# EAGLE board SparkFun_DC-DC_Converter_Breakout_Panel_v12 (EAGLE 7.4.0), part 1 of 2
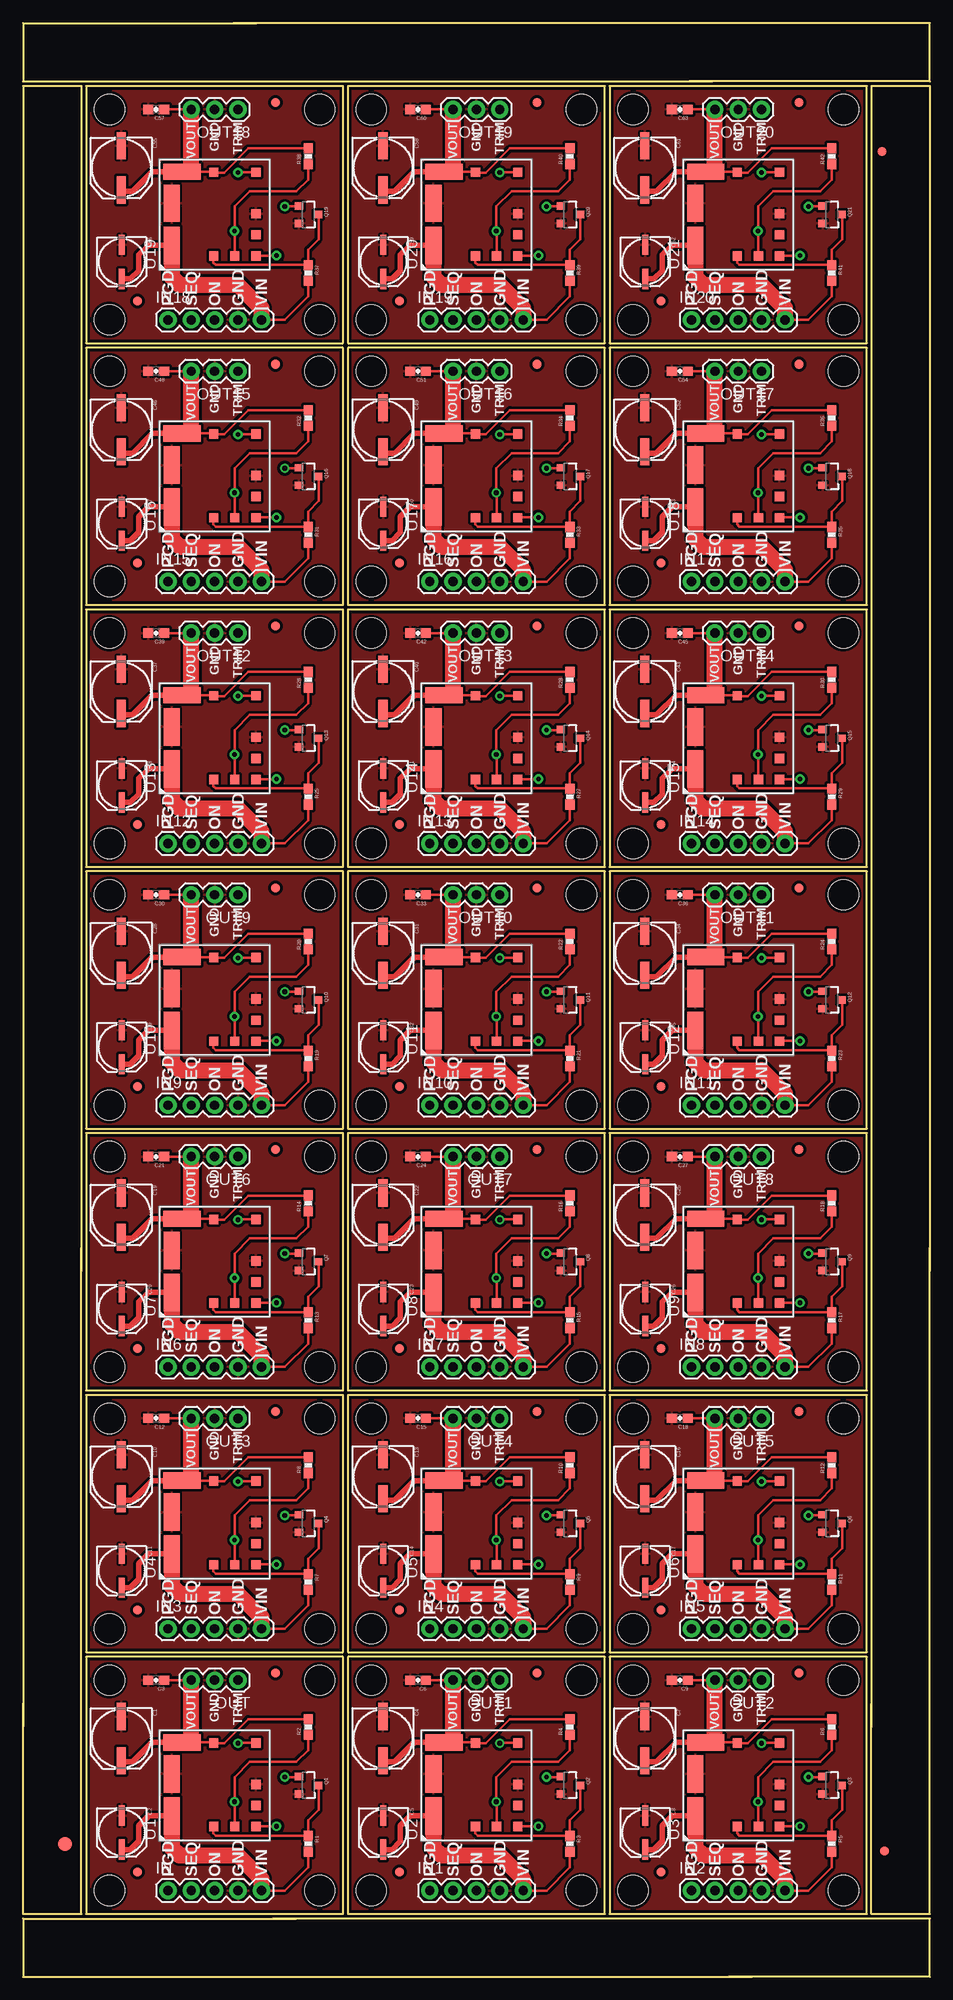
[diagram p0: board, top side]
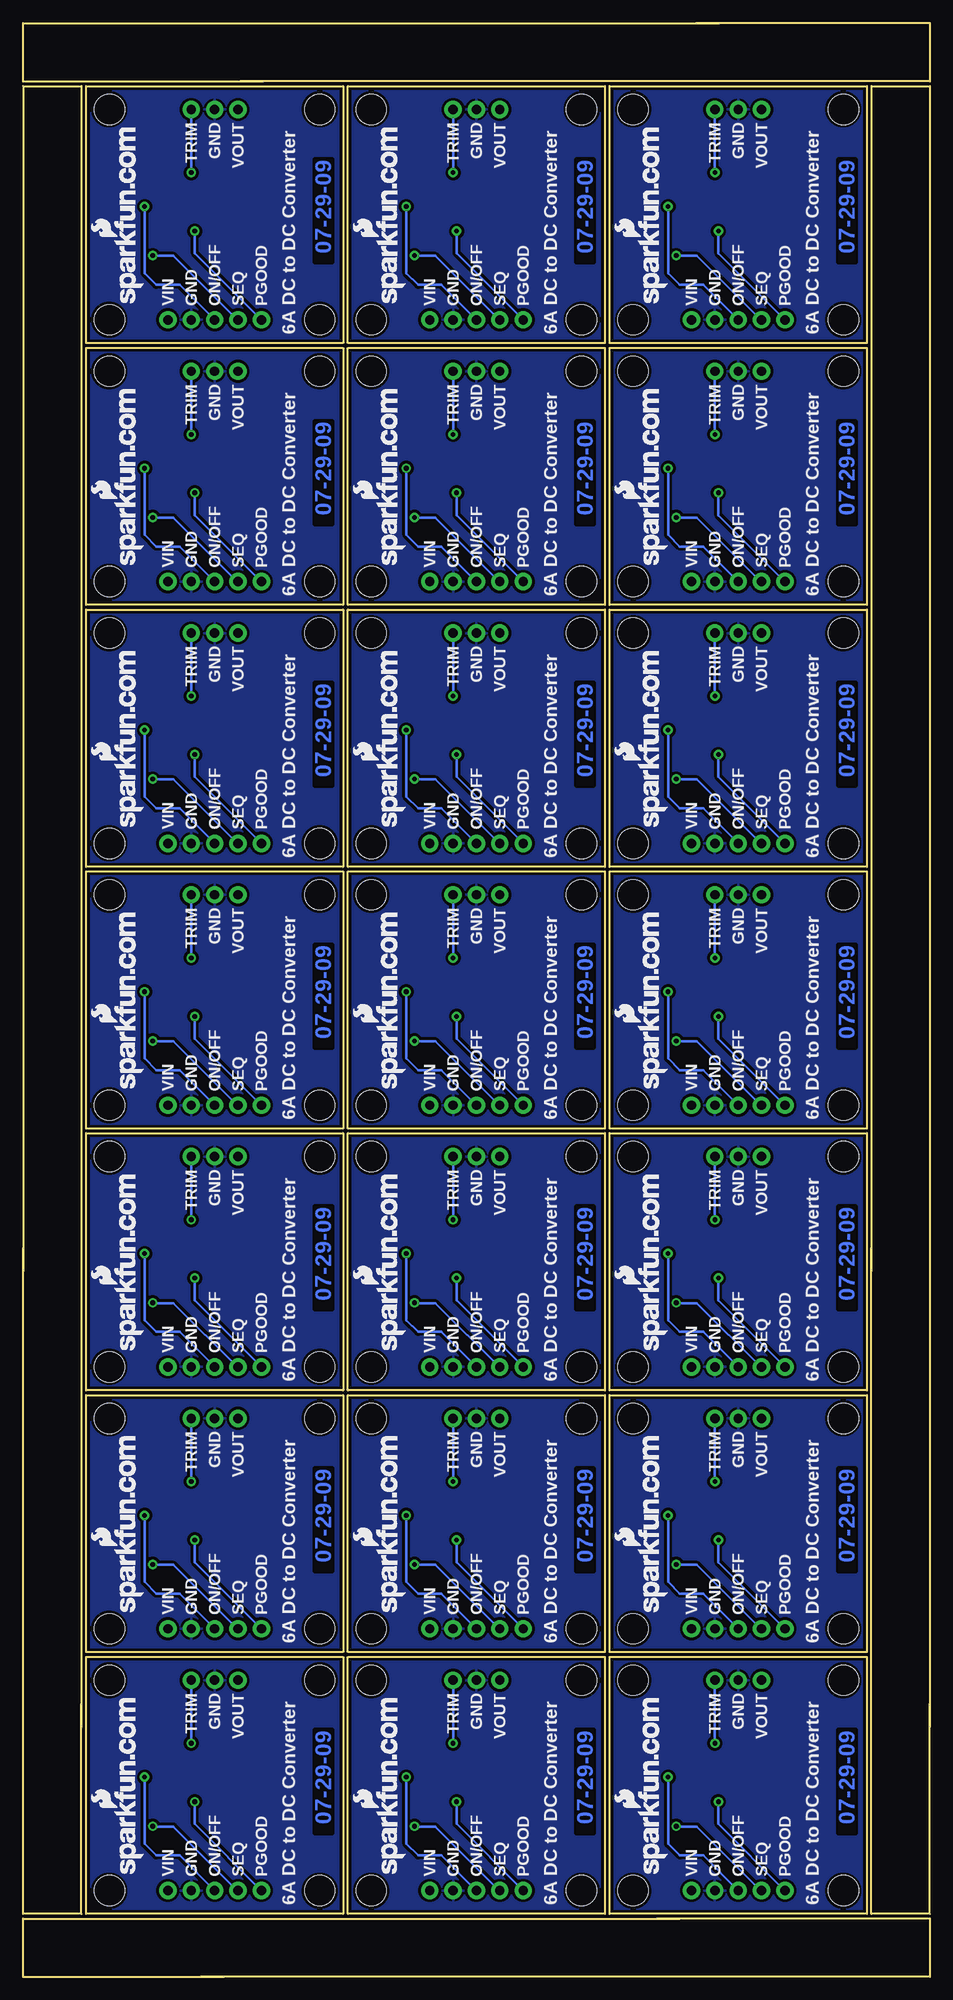
[diagram p1: board, bottom side, seen from below]

Size 98.55 x 212.34 mm. Coordinates in mm from the lower left corner, seen from the top.
Outline: 6.35,79.25 6.35,6.86 0,6.86 0,29.72
Outline: 0,27.18 0,205.49 6.35,205.49 6.35,76.71
Outline: 79.25,0 0,0 0,6.35 29.72,6.35
Outline: 27.18,6.35 98.55,6.35 98.55,0 76.71,0
Outline: 98.55,79.25 98.55,6.86 92.2,6.86 92.2,29.72
Outline: 92.2,27.18 92.2,205.49 98.55,205.49 98.55,76.71
Outline: 22.86,212.34 98.55,212.34 98.55,205.99 72.39,205.99
Outline: 74.93,205.99 0,205.99 0,212.34 25.4,212.34
Outline: 6.86,6.86 34.8,6.86 34.8,34.8 6.86,34.8 6.86,6.86
Outline: 35.31,6.86 63.25,6.86 63.25,34.8 35.31,34.8 35.31,6.86
Outline: 63.75,6.86 91.69,6.86 91.69,34.8 63.75,34.8 63.75,6.86
Outline: 6.86,35.31 34.8,35.31 34.8,63.25 6.86,63.25 6.86,35.31
Outline: 35.31,35.31 63.25,35.31 63.25,63.25 35.31,63.25 35.31,35.31
Outline: 63.75,35.31 91.69,35.31 91.69,63.25 63.75,63.25 63.75,35.31
Outline: 6.86,63.75 34.8,63.75 34.8,91.69 6.86,91.69 6.86,63.75
Outline: 35.31,63.75 63.25,63.75 63.25,91.69 35.31,91.69 35.31,63.75
Outline: 63.75,63.75 91.69,63.75 91.69,91.69 63.75,91.69 63.75,63.75
Outline: 6.86,92.2 34.8,92.2 34.8,120.14 6.86,120.14 6.86,92.2
Outline: 35.31,92.2 63.25,92.2 63.25,120.14 35.31,120.14 35.31,92.2
Outline: 63.75,92.2 91.69,92.2 91.69,120.14 63.75,120.14 63.75,92.2
Outline: 6.86,120.65 34.8,120.65 34.8,148.59 6.86,148.59 6.86,120.65
Outline: 35.31,120.65 63.25,120.65 63.25,148.59 35.31,148.59 35.31,120.65
Outline: 63.75,120.65 91.69,120.65 91.69,148.59 63.75,148.59 63.75,120.65
Outline: 6.86,149.1 34.8,149.1 34.8,177.04 6.86,177.04 6.86,149.1
Outline: 35.31,149.1 63.25,149.1 63.25,177.04 35.31,177.04 35.31,149.1
Outline: 63.75,149.1 91.69,149.1 91.69,177.04 63.75,177.04 63.75,149.1
Outline: 6.86,177.55 34.8,177.55 34.8,205.49 6.86,205.49 6.86,177.55
Outline: 35.31,177.55 63.25,177.55 63.25,205.49 35.31,205.49 35.31,177.55
Outline: 63.75,177.55 91.69,177.55 91.69,205.49 63.75,205.49 63.75,177.55
Copper layers (1*16): Top 0.035mm / dielectric 1.5mm / Bottom 0.035mm
Design rules "SparkFun": minimum track width 8mil, minimum drill 20mil, track to track 8mil, track to pad 8mil, pad to pad 8mil, via to via 8mil, smd to smd 8mil, copper to edge 10mil, drill to drill 8mil, minimum pad ring 12mil, minimum via ring 10mil, stop-mask expansion 4mil, vias tented up to drill 25mil, thermal gap 10mil

## Footprints (pad centres in the part's own frame; a part is rotated, then mirrored left to right if it is on the bottom)
NIPPON_F80 = smd 2.95 x 1: + 2.4,0; - -2.4,0
PANASONIC_C = smd 2.2 x 0.65: + 1.9,-0.2; - -1.8,-0.2
0603-CAP = smd 1.1 x 1: 1 -0.85,0; 2 0.85,0
FIDUCIAL-1X2 = smd 1 x 1: 1 0,0
FIDUCIAL-1.5X3 = smd 1.5 x 1.5: 1 0,0
1X05 = drill 1.016 pad 1.88: 1 0,0; 2 2.54,0; 3 5.08,0; 4 7.62,0; 5 10.16,0
1X03 = drill 1.016 pad 1.88: 1 0,0; 2 2.54,0; 3 5.08,0
SOT23-3 = smd 0.8 x 0.9: 1 -0.95,-1; 2 0.95,-1; 3 0,1.1
0603-RES = smd 1.1 x 1: 1 -0.85,0; 2 0.85,0
DC-DC_CONVERTER = smd 1.01 x 1.01: 1 -4.48,0.1; 5 4.61,0.1; 6 4.61,-4.48; 7 0.1,-4.48; 8 -2.19,-4.48; 9 -4.48,-4.48; 10 -4.48,-2.19 | smd 4.07 x 1.77: 2 -3.33,4.67; 3 1.24,4.67 | smd 1.77 x 4.07: 4 4.67,3.53
STAND-OFF = hole 3.302: 0,0

## Placement (x,y rotation side)
C1  100uF-25V  [NIPPON_F80]  10.67,25.91 270 top
C2  22uF-35v  [PANASONIC_C]  10.92,15.75 270 top
C3  0.1uF  [0603-CAP]  14.48,32.26 180 top
C4  100uF-25V  [NIPPON_F80]  39.12,25.91 270 top
C5  22uF-35v  [PANASONIC_C]  39.37,15.75 270 top
C6  0.1uF  [0603-CAP]  42.93,32.26 180 top
C7  100uF-25V  [NIPPON_F80]  67.56,25.91 270 top
C8  22uF-35v  [PANASONIC_C]  67.82,15.75 270 top
C9  0.1uF  [0603-CAP]  71.37,32.26 180 top
C10  100uF-25V  [NIPPON_F80]  10.67,54.36 270 top
C11  22uF-35v  [PANASONIC_C]  10.92,44.2 270 top
C12  0.1uF  [0603-CAP]  14.48,60.71 180 top
C13  100uF-25V  [NIPPON_F80]  39.12,54.36 270 top
C14  22uF-35v  [PANASONIC_C]  39.37,44.2 270 top
C15  0.1uF  [0603-CAP]  42.93,60.71 180 top
C16  100uF-25V  [NIPPON_F80]  67.56,54.36 270 top
C17  22uF-35v  [PANASONIC_C]  67.82,44.2 270 top
C18  0.1uF  [0603-CAP]  71.37,60.71 180 top
C19  100uF-25V  [NIPPON_F80]  10.67,82.8 270 top
C20  22uF-35v  [PANASONIC_C]  10.92,72.64 270 top
C21  0.1uF  [0603-CAP]  14.48,89.15 180 top
C22  100uF-25V  [NIPPON_F80]  39.12,82.8 270 top
C23  22uF-35v  [PANASONIC_C]  39.37,72.64 270 top
C24  0.1uF  [0603-CAP]  42.93,89.15 180 top
C25  100uF-25V  [NIPPON_F80]  67.56,82.8 270 top
C26  22uF-35v  [PANASONIC_C]  67.82,72.64 270 top
C27  0.1uF  [0603-CAP]  71.37,89.15 180 top
C28  100uF-25V  [NIPPON_F80]  10.67,111.25 270 top
C29  22uF-35v  [PANASONIC_C]  10.92,101.09 270 top
C30  0.1uF  [0603-CAP]  14.48,117.6 180 top
C31  100uF-25V  [NIPPON_F80]  39.12,111.25 270 top
C32  22uF-35v  [PANASONIC_C]  39.37,101.09 270 top
C33  0.1uF  [0603-CAP]  42.93,117.6 180 top
C34  100uF-25V  [NIPPON_F80]  67.56,111.25 270 top
C35  22uF-35v  [PANASONIC_C]  67.82,101.09 270 top
C36  0.1uF  [0603-CAP]  71.37,117.6 180 top
C37  100uF-25V  [NIPPON_F80]  10.67,139.7 270 top
C38  22uF-35v  [PANASONIC_C]  10.92,129.54 270 top
C39  0.1uF  [0603-CAP]  14.48,146.05 180 top
C40  100uF-25V  [NIPPON_F80]  39.12,139.7 270 top
C41  22uF-35v  [PANASONIC_C]  39.37,129.54 270 top
C42  0.1uF  [0603-CAP]  42.93,146.05 180 top
C43  100uF-25V  [NIPPON_F80]  67.56,139.7 270 top
C44  22uF-35v  [PANASONIC_C]  67.82,129.54 270 top
C45  0.1uF  [0603-CAP]  71.37,146.05 180 top
C46  100uF-25V  [NIPPON_F80]  10.67,168.15 270 top
C47  22uF-35v  [PANASONIC_C]  10.92,157.99 270 top
C48  0.1uF  [0603-CAP]  14.48,174.5 180 top
C49  100uF-25V  [NIPPON_F80]  39.12,168.15 270 top
C50  22uF-35v  [PANASONIC_C]  39.37,157.99 270 top
C51  0.1uF  [0603-CAP]  42.93,174.5 180 top
C52  100uF-25V  [NIPPON_F80]  67.56,168.15 270 top
C53  22uF-35v  [PANASONIC_C]  67.82,157.99 270 top
C54  0.1uF  [0603-CAP]  71.37,174.5 180 top
C55  100uF-25V  [NIPPON_F80]  10.67,196.6 270 top
C56  22uF-35v  [PANASONIC_C]  10.92,186.44 270 top
C57  0.1uF  [0603-CAP]  14.48,202.95 180 top
C58  100uF-25V  [NIPPON_F80]  39.12,196.6 270 top
C59  22uF-35v  [PANASONIC_C]  39.37,186.44 270 top
C60  0.1uF  [0603-CAP]  42.93,202.95 180 top
C61  100uF-25V  [NIPPON_F80]  67.56,196.6 270 top
C62  22uF-35v  [PANASONIC_C]  67.82,186.44 270 top
C63  0.1uF  [0603-CAP]  71.37,202.95 180 top
E$1  [FIDUCIAL-1X2]  93.34,198.37 0 top
E$2  [FIDUCIAL-1.5X3]  4.57,14.48 0 top
E$5  [FIDUCIAL-1X2]  93.6,13.72 0 top
FID1  FIDUCIAL1X2  [FIDUCIAL-1X2]  27.43,33.02 0 top
FID2  FIDUCIAL1X2  [FIDUCIAL-1X2]  12.45,11.43 0 top
FID3  FIDUCIAL1X2  [FIDUCIAL-1X2]  55.88,33.02 0 top
FID4  FIDUCIAL1X2  [FIDUCIAL-1X2]  40.89,11.43 0 top
FID5  FIDUCIAL1X2  [FIDUCIAL-1X2]  84.33,33.02 0 top
FID6  FIDUCIAL1X2  [FIDUCIAL-1X2]  69.34,11.43 0 top
FID7  FIDUCIAL1X2  [FIDUCIAL-1X2]  27.43,61.47 0 top
FID8  FIDUCIAL1X2  [FIDUCIAL-1X2]  12.45,39.88 0 top
FID9  FIDUCIAL1X2  [FIDUCIAL-1X2]  55.88,61.47 0 top
FID10  FIDUCIAL1X2  [FIDUCIAL-1X2]  40.89,39.88 0 top
FID11  FIDUCIAL1X2  [FIDUCIAL-1X2]  84.33,61.47 0 top
FID12  FIDUCIAL1X2  [FIDUCIAL-1X2]  69.34,39.88 0 top
FID13  FIDUCIAL1X2  [FIDUCIAL-1X2]  27.43,89.92 0 top
FID14  FIDUCIAL1X2  [FIDUCIAL-1X2]  12.45,68.33 0 top
FID15  FIDUCIAL1X2  [FIDUCIAL-1X2]  55.88,89.92 0 top
FID16  FIDUCIAL1X2  [FIDUCIAL-1X2]  40.89,68.33 0 top
FID17  FIDUCIAL1X2  [FIDUCIAL-1X2]  84.33,89.92 0 top
FID18  FIDUCIAL1X2  [FIDUCIAL-1X2]  69.34,68.33 0 top
FID19  FIDUCIAL1X2  [FIDUCIAL-1X2]  27.43,118.36 0 top
FID20  FIDUCIAL1X2  [FIDUCIAL-1X2]  12.45,96.77 0 top
FID21  FIDUCIAL1X2  [FIDUCIAL-1X2]  55.88,118.36 0 top
FID22  FIDUCIAL1X2  [FIDUCIAL-1X2]  40.89,96.77 0 top
FID23  FIDUCIAL1X2  [FIDUCIAL-1X2]  84.33,118.36 0 top
FID24  FIDUCIAL1X2  [FIDUCIAL-1X2]  69.34,96.77 0 top
FID25  FIDUCIAL1X2  [FIDUCIAL-1X2]  27.43,146.81 0 top
FID26  FIDUCIAL1X2  [FIDUCIAL-1X2]  12.45,125.22 0 top
FID27  FIDUCIAL1X2  [FIDUCIAL-1X2]  55.88,146.81 0 top
FID28  FIDUCIAL1X2  [FIDUCIAL-1X2]  40.89,125.22 0 top
FID29  FIDUCIAL1X2  [FIDUCIAL-1X2]  84.33,146.81 0 top
FID30  FIDUCIAL1X2  [FIDUCIAL-1X2]  69.34,125.22 0 top
FID31  FIDUCIAL1X2  [FIDUCIAL-1X2]  27.43,175.26 0 top
FID32  FIDUCIAL1X2  [FIDUCIAL-1X2]  12.45,153.67 0 top
FID33  FIDUCIAL1X2  [FIDUCIAL-1X2]  55.88,175.26 0 top
FID34  FIDUCIAL1X2  [FIDUCIAL-1X2]  40.89,153.67 0 top
FID35  FIDUCIAL1X2  [FIDUCIAL-1X2]  84.33,175.26 0 top
FID36  FIDUCIAL1X2  [FIDUCIAL-1X2]  69.34,153.67 0 top
FID37  FIDUCIAL1X2  [FIDUCIAL-1X2]  27.43,203.71 0 top
FID38  FIDUCIAL1X2  [FIDUCIAL-1X2]  12.45,182.12 0 top
FID39  FIDUCIAL1X2  [FIDUCIAL-1X2]  55.88,203.71 0 top
FID40  FIDUCIAL1X2  [FIDUCIAL-1X2]  40.89,182.12 0 top
FID41  FIDUCIAL1X2  [FIDUCIAL-1X2]  84.33,203.71 0 top
FID42  FIDUCIAL1X2  [FIDUCIAL-1X2]  69.34,182.12 0 top
IN  [1X05]  15.75,9.4 0 top
IN1  [1X05]  44.2,9.4 0 top
IN2  [1X05]  72.64,9.4 0 top
IN3  [1X05]  15.75,37.85 0 top
IN4  [1X05]  44.2,37.85 0 top
IN5  [1X05]  72.64,37.85 0 top
IN6  [1X05]  15.75,66.29 0 top
IN7  [1X05]  44.2,66.29 0 top
IN8  [1X05]  72.64,66.29 0 top
IN9  [1X05]  15.75,94.74 0 top
IN10  [1X05]  44.2,94.74 0 top
IN11  [1X05]  72.64,94.74 0 top
IN12  [1X05]  15.75,123.19 0 top
IN13  [1X05]  44.2,123.19 0 top
IN14  [1X05]  72.64,123.19 0 top
IN15  [1X05]  15.75,151.64 0 top
IN16  [1X05]  44.2,151.64 0 top
IN17  [1X05]  72.64,151.64 0 top
IN18  [1X05]  15.75,180.09 0 top
IN19  [1X05]  44.2,180.09 0 top
IN20  [1X05]  72.64,180.09 0 top
OUT  [1X03]  23.37,32.26 180 top
OUT1  [1X03]  51.82,32.26 180 top
OUT2  [1X03]  80.26,32.26 180 top
OUT3  [1X03]  23.37,60.71 180 top
OUT4  [1X03]  51.82,60.71 180 top
OUT5  [1X03]  80.26,60.71 180 top
OUT6  [1X03]  23.37,89.15 180 top
OUT7  [1X03]  51.82,89.15 180 top
OUT8  [1X03]  80.26,89.15 180 top
OUT9  [1X03]  23.37,117.6 180 top
OUT10  [1X03]  51.82,117.6 180 top
OUT11  [1X03]  80.26,117.6 180 top
OUT12  [1X03]  23.37,146.05 180 top
OUT13  [1X03]  51.82,146.05 180 top
OUT14  [1X03]  80.26,146.05 180 top
OUT15  [1X03]  23.37,174.5 180 top
OUT16  [1X03]  51.82,174.5 180 top
OUT17  [1X03]  80.26,174.5 180 top
OUT18  [1X03]  23.37,202.95 180 top
OUT19  [1X03]  51.82,202.95 180 top
OUT20  [1X03]  80.26,202.95 180 top
Q1  MOSFET-NCHANNELSMD  [SOT23-3]  30.99,20.83 270 top
Q2  MOSFET-NCHANNELSMD  [SOT23-3]  59.44,20.83 270 top
Q3  MOSFET-NCHANNELSMD  [SOT23-3]  87.88,20.83 270 top
Q4  MOSFET-NCHANNELSMD  [SOT23-3]  30.99,49.28 270 top
Q5  MOSFET-NCHANNELSMD  [SOT23-3]  59.44,49.28 270 top
Q6  MOSFET-NCHANNELSMD  [SOT23-3]  87.88,49.28 270 top
Q7  MOSFET-NCHANNELSMD  [SOT23-3]  30.99,77.72 270 top
Q8  MOSFET-NCHANNELSMD  [SOT23-3]  59.44,77.72 270 top
Q9  MOSFET-NCHANNELSMD  [SOT23-3]  87.88,77.72 270 top
Q10  MOSFET-NCHANNELSMD  [SOT23-3]  30.99,106.17 270 top
Q11  MOSFET-NCHANNELSMD  [SOT23-3]  59.44,106.17 270 top
Q12  MOSFET-NCHANNELSMD  [SOT23-3]  87.88,106.17 270 top
Q13  MOSFET-NCHANNELSMD  [SOT23-3]  30.99,134.62 270 top
Q14  MOSFET-NCHANNELSMD  [SOT23-3]  59.44,134.62 270 top
Q15  MOSFET-NCHANNELSMD  [SOT23-3]  87.88,134.62 270 top
Q16  MOSFET-NCHANNELSMD  [SOT23-3]  30.99,163.07 270 top
Q17  MOSFET-NCHANNELSMD  [SOT23-3]  59.44,163.07 270 top
Q18  MOSFET-NCHANNELSMD  [SOT23-3]  87.88,163.07 270 top
Q19  MOSFET-NCHANNELSMD  [SOT23-3]  30.99,191.52 270 top
Q20  MOSFET-NCHANNELSMD  [SOT23-3]  59.44,191.52 270 top
Q21  MOSFET-NCHANNELSMD  [SOT23-3]  87.88,191.52 270 top
R1  22K  [0603-RES]  30.99,14.48 270 top
R2  100K  [0603-RES]  30.99,27.18 90 top
R3  22K  [0603-RES]  59.44,14.48 270 top
R4  100K  [0603-RES]  59.44,27.18 90 top
R5  22K  [0603-RES]  87.88,14.48 270 top
R6  100K  [0603-RES]  87.88,27.18 90 top
R7  22K  [0603-RES]  30.99,42.93 270 top
R8  100K  [0603-RES]  30.99,55.63 90 top
R9  22K  [0603-RES]  59.44,42.93 270 top
R10  100K  [0603-RES]  59.44,55.63 90 top
R11  22K  [0603-RES]  87.88,42.93 270 top
R12  100K  [0603-RES]  87.88,55.63 90 top
R13  22K  [0603-RES]  30.99,71.37 270 top
R14  100K  [0603-RES]  30.99,84.07 90 top
R15  22K  [0603-RES]  59.44,71.37 270 top
R16  100K  [0603-RES]  59.44,84.07 90 top
R17  22K  [0603-RES]  87.88,71.37 270 top
R18  100K  [0603-RES]  87.88,84.07 90 top
R19  22K  [0603-RES]  30.99,99.82 270 top
R20  100K  [0603-RES]  30.99,112.52 90 top
R21  22K  [0603-RES]  59.44,99.82 270 top
R22  100K  [0603-RES]  59.44,112.52 90 top
R23  22K  [0603-RES]  87.88,99.82 270 top
R24  100K  [0603-RES]  87.88,112.52 90 top
R25  22K  [0603-RES]  30.99,128.27 270 top
R26  100K  [0603-RES]  30.99,140.97 90 top
R27  22K  [0603-RES]  59.44,128.27 270 top
R28  100K  [0603-RES]  59.44,140.97 90 top
R29  22K  [0603-RES]  87.88,128.27 270 top
R30  100K  [0603-RES]  87.88,140.97 90 top
R31  22K  [0603-RES]  30.99,156.72 270 top
R32  100K  [0603-RES]  30.99,169.42 90 top
R33  22K  [0603-RES]  59.44,156.72 270 top
R34  100K  [0603-RES]  59.44,169.42 90 top
R35  22K  [0603-RES]  87.88,156.72 270 top
R36  100K  [0603-RES]  87.88,169.42 90 top
R37  22K  [0603-RES]  30.99,185.17 270 top
R38  100K  [0603-RES]  30.99,197.87 90 top
R39  22K  [0603-RES]  59.44,185.17 270 top
R40  100K  [0603-RES]  59.44,197.87 90 top
R41  22K  [0603-RES]  87.88,185.17 270 top
R42  100K  [0603-RES]  87.88,197.87 90 top
U1  DC-DC_CONVERTER  [DC-DC_CONVERTER]  20.83,20.83 90 top
U2  DC-DC_CONVERTER  [DC-DC_CONVERTER]  49.28,20.83 90 top
U3  DC-DC_CONVERTER  [DC-DC_CONVERTER]  77.72,20.83 90 top
U4  DC-DC_CONVERTER  [DC-DC_CONVERTER]  20.83,49.28 90 top
U5  DC-DC_CONVERTER  [DC-DC_CONVERTER]  49.28,49.28 90 top
U6  DC-DC_CONVERTER  [DC-DC_CONVERTER]  77.72,49.28 90 top
U7  DC-DC_CONVERTER  [DC-DC_CONVERTER]  20.83,77.72 90 top
U8  DC-DC_CONVERTER  [DC-DC_CONVERTER]  49.28,77.72 90 top
U9  DC-DC_CONVERTER  [DC-DC_CONVERTER]  77.72,77.72 90 top
U10  DC-DC_CONVERTER  [DC-DC_CONVERTER]  20.83,106.17 90 top
U11  DC-DC_CONVERTER  [DC-DC_CONVERTER]  49.28,106.17 90 top
U12  DC-DC_CONVERTER  [DC-DC_CONVERTER]  77.72,106.17 90 top
U13  DC-DC_CONVERTER  [DC-DC_CONVERTER]  20.83,134.62 90 top
U14  DC-DC_CONVERTER  [DC-DC_CONVERTER]  49.28,134.62 90 top
U15  DC-DC_CONVERTER  [DC-DC_CONVERTER]  77.72,134.62 90 top
U16  DC-DC_CONVERTER  [DC-DC_CONVERTER]  20.83,163.07 90 top
U17  DC-DC_CONVERTER  [DC-DC_CONVERTER]  49.28,163.07 90 top
U18  DC-DC_CONVERTER  [DC-DC_CONVERTER]  77.72,163.07 90 top
U19  DC-DC_CONVERTER  [DC-DC_CONVERTER]  20.83,191.52 90 top
U20  DC-DC_CONVERTER  [DC-DC_CONVERTER]  49.28,191.52 90 top
U21  DC-DC_CONVERTER  [DC-DC_CONVERTER]  77.72,191.52 90 top
U$1  STAND-OFF  [STAND-OFF]  9.4,9.4 0 top
U$2  LOGO-SFENEW  [SFE-NEW-WEBLOGO]  28.55,11.25 90 bottom
U$3  STAND-OFF  [STAND-OFF]  32.26,9.4 0 top
U$4  STAND-OFF  [STAND-OFF]  9.4,32.26 0 top
U$5  STAND-OFF  [STAND-OFF]  32.26,32.26 0 top
U$6  LOGO-SFENEW  [SFE-NEW-WEBLOGO]  57,11.25 90 bottom
U$7  STAND-OFF  [STAND-OFF]  37.85,9.4 0 top
U$8  STAND-OFF  [STAND-OFF]  60.71,9.4 0 top
U$9  STAND-OFF  [STAND-OFF]  37.85,32.26 0 top
U$10  STAND-OFF  [STAND-OFF]  60.71,32.26 0 top
U$11  LOGO-SFENEW  [SFE-NEW-WEBLOGO]  85.45,11.25 90 bottom
U$12  STAND-OFF  [STAND-OFF]  66.29,9.4 0 top
U$13  STAND-OFF  [STAND-OFF]  89.15,9.4 0 top
U$14  STAND-OFF  [STAND-OFF]  66.29,32.26 0 top
U$15  STAND-OFF  [STAND-OFF]  89.15,32.26 0 top
U$16  LOGO-SFENEW  [SFE-NEW-WEBLOGO]  28.55,39.7 90 bottom
U$17  STAND-OFF  [STAND-OFF]  9.4,37.85 0 top
U$18  STAND-OFF  [STAND-OFF]  32.26,37.85 0 top
U$19  STAND-OFF  [STAND-OFF]  9.4,60.71 0 top
U$20  STAND-OFF  [STAND-OFF]  32.26,60.71 0 top
U$21  LOGO-SFENEW  [SFE-NEW-WEBLOGO]  57,39.7 90 bottom
U$22  STAND-OFF  [STAND-OFF]  37.85,37.85 0 top
U$23  STAND-OFF  [STAND-OFF]  60.71,37.85 0 top
U$24  STAND-OFF  [STAND-OFF]  37.85,60.71 0 top
U$25  STAND-OFF  [STAND-OFF]  60.71,60.71 0 top
U$26  LOGO-SFENEW  [SFE-NEW-WEBLOGO]  85.45,39.7 90 bottom
U$27  STAND-OFF  [STAND-OFF]  66.29,37.85 0 top
U$28  STAND-OFF  [STAND-OFF]  89.15,37.85 0 top
U$29  STAND-OFF  [STAND-OFF]  66.29,60.71 0 top
U$30  STAND-OFF  [STAND-OFF]  89.15,60.71 0 top
U$31  LOGO-SFENEW  [SFE-NEW-WEBLOGO]  28.55,68.15 90 bottom
U$32  STAND-OFF  [STAND-OFF]  9.4,66.29 0 top
U$33  STAND-OFF  [STAND-OFF]  32.26,66.29 0 top
U$34  STAND-OFF  [STAND-OFF]  9.4,89.15 0 top
U$35  STAND-OFF  [STAND-OFF]  32.26,89.15 0 top
U$36  LOGO-SFENEW  [SFE-NEW-WEBLOGO]  57,68.15 90 bottom
U$37  STAND-OFF  [STAND-OFF]  37.85,66.29 0 top
U$38  STAND-OFF  [STAND-OFF]  60.71,66.29 0 top
U$39  STAND-OFF  [STAND-OFF]  37.85,89.15 0 top
U$40  STAND-OFF  [STAND-OFF]  60.71,89.15 0 top
U$41  LOGO-SFENEW  [SFE-NEW-WEBLOGO]  85.45,68.15 90 bottom
U$42  STAND-OFF  [STAND-OFF]  66.29,66.29 0 top
U$43  STAND-OFF  [STAND-OFF]  89.15,66.29 0 top
U$44  STAND-OFF  [STAND-OFF]  66.29,89.15 0 top
U$45  STAND-OFF  [STAND-OFF]  89.15,89.15 0 top
U$46  LOGO-SFENEW  [SFE-NEW-WEBLOGO]  28.55,96.6 90 bottom
U$47  STAND-OFF  [STAND-OFF]  9.4,94.74 0 top
U$48  STAND-OFF  [STAND-OFF]  32.26,94.74 0 top
U$49  STAND-OFF  [STAND-OFF]  9.4,117.6 0 top
U$50  STAND-OFF  [STAND-OFF]  32.26,117.6 0 top
U$51  LOGO-SFENEW  [SFE-NEW-WEBLOGO]  57,96.6 90 bottom
U$52  STAND-OFF  [STAND-OFF]  37.85,94.74 0 top
U$53  STAND-OFF  [STAND-OFF]  60.71,94.74 0 top
U$54  STAND-OFF  [STAND-OFF]  37.85,117.6 0 top
U$55  STAND-OFF  [STAND-OFF]  60.71,117.6 0 top
U$56  LOGO-SFENEW  [SFE-NEW-WEBLOGO]  85.45,96.6 90 bottom
U$57  STAND-OFF  [STAND-OFF]  66.29,94.74 0 top
U$58  STAND-OFF  [STAND-OFF]  89.15,94.74 0 top
U$59  STAND-OFF  [STAND-OFF]  66.29,117.6 0 top
U$60  STAND-OFF  [STAND-OFF]  89.15,117.6 0 top
U$61  LOGO-SFENEW  [SFE-NEW-WEBLOGO]  28.55,125.04 90 bottom
U$62  STAND-OFF  [STAND-OFF]  9.4,123.19 0 top
U$63  STAND-OFF  [STAND-OFF]  32.26,123.19 0 top
U$64  STAND-OFF  [STAND-OFF]  9.4,146.05 0 top
U$65  STAND-OFF  [STAND-OFF]  32.26,146.05 0 top
U$66  LOGO-SFENEW  [SFE-NEW-WEBLOGO]  57,125.04 90 bottom
U$67  STAND-OFF  [STAND-OFF]  37.85,123.19 0 top
U$68  STAND-OFF  [STAND-OFF]  60.71,123.19 0 top
U$69  STAND-OFF  [STAND-OFF]  37.85,146.05 0 top
U$70  STAND-OFF  [STAND-OFF]  60.71,146.05 0 top
U$71  LOGO-SFENEW  [SFE-NEW-WEBLOGO]  85.45,125.04 90 bottom
U$72  STAND-OFF  [STAND-OFF]  66.29,123.19 0 top
U$73  STAND-OFF  [STAND-OFF]  89.15,123.19 0 top
U$74  STAND-OFF  [STAND-OFF]  66.29,146.05 0 top
U$75  STAND-OFF  [STAND-OFF]  89.15,146.05 0 top
U$76  LOGO-SFENEW  [SFE-NEW-WEBLOGO]  28.55,153.49 90 bottom
U$77  STAND-OFF  [STAND-OFF]  9.4,151.64 0 top
U$78  STAND-OFF  [STAND-OFF]  32.26,151.64 0 top
U$79  STAND-OFF  [STAND-OFF]  9.4,174.5 0 top
U$80  STAND-OFF  [STAND-OFF]  32.26,174.5 0 top
U$81  LOGO-SFENEW  [SFE-NEW-WEBLOGO]  57,153.49 90 bottom
U$82  STAND-OFF  [STAND-OFF]  37.85,151.64 0 top
U$83  STAND-OFF  [STAND-OFF]  60.71,151.64 0 top
U$84  STAND-OFF  [STAND-OFF]  37.85,174.5 0 top
U$85  STAND-OFF  [STAND-OFF]  60.71,174.5 0 top
U$86  LOGO-SFENEW  [SFE-NEW-WEBLOGO]  85.45,153.49 90 bottom
U$87  STAND-OFF  [STAND-OFF]  66.29,151.64 0 top
U$88  STAND-OFF  [STAND-OFF]  89.15,151.64 0 top
U$89  STAND-OFF  [STAND-OFF]  66.29,174.5 0 top
U$90  STAND-OFF  [STAND-OFF]  89.15,174.5 0 top
U$91  LOGO-SFENEW  [SFE-NEW-WEBLOGO]  28.55,181.94 90 bottom
U$92  STAND-OFF  [STAND-OFF]  9.4,180.09 0 top
U$93  STAND-OFF  [STAND-OFF]  32.26,180.09 0 top
U$94  STAND-OFF  [STAND-OFF]  9.4,202.95 0 top
U$95  STAND-OFF  [STAND-OFF]  32.26,202.95 0 top
U$96  LOGO-SFENEW  [SFE-NEW-WEBLOGO]  57,181.94 90 bottom
U$97  STAND-OFF  [STAND-OFF]  37.85,180.09 0 top
U$98  STAND-OFF  [STAND-OFF]  60.71,180.09 0 top
U$99  STAND-OFF  [STAND-OFF]  37.85,202.95 0 top
U$100  STAND-OFF  [STAND-OFF]  60.71,202.95 0 top
U$101  LOGO-SFENEW  [SFE-NEW-WEBLOGO]  85.45,181.94 90 bottom
U$102  STAND-OFF  [STAND-OFF]  66.29,180.09 0 top
U$103  STAND-OFF  [STAND-OFF]  89.15,180.09 0 top
U$104  STAND-OFF  [STAND-OFF]  66.29,202.95 0 top
U$105  STAND-OFF  [STAND-OFF]  89.15,202.95 0 top

## Library data of the parts
C1-C63 IN IN1-IN20 OUT OUT1-OUT20 Q1-Q21 R1-R42 U1-U21 U$1-U$105 = SparkFun
E$1 E$5 FID1-FID42 = SparkFun-Aesthetics
E$2 = SparkFun-Retired

## Nets
GND: C1.- C2.- C3.2 IN.4 OUT.2 Q1.2 U1.3 U1.7
GND1: C4.- C5.- C6.2 IN1.4 OUT1.2 Q2.2 U2.3 U2.7
GND2: C7.- C8.- C9.2 IN2.4 OUT2.2 Q3.2 U3.3 U3.7
GND3: C10.- C11.- C12.2 IN3.4 OUT3.2 Q4.2 U4.3 U4.7
GND4: C13.- C14.- C15.2 IN4.4 OUT4.2 Q5.2 U5.3 U5.7
GND5: C16.- C17.- C18.2 IN5.4 OUT5.2 Q6.2 U6.3 U6.7
GND6: C19.- C20.- C21.2 IN6.4 OUT6.2 Q7.2 U7.3 U7.7
GND7: C22.- C23.- C24.2 IN7.4 OUT7.2 Q8.2 U8.3 U8.7
GND8: C25.- C26.- C27.2 IN8.4 OUT8.2 Q9.2 U9.3 U9.7
GND9: C28.- C29.- C30.2 IN9.4 OUT9.2 Q10.2 U10.3 U10.7
GND10: C31.- C32.- C33.2 IN10.4 OUT10.2 Q11.2 U11.3 U11.7
GND11: C34.- C35.- C36.2 IN11.4 OUT11.2 Q12.2 U12.3 U12.7
GND12: C37.- C38.- C39.2 IN12.4 OUT12.2 Q13.2 U13.3 U13.7
GND13: C40.- C41.- C42.2 IN13.4 OUT13.2 Q14.2 U14.3 U14.7
GND14: C43.- C44.- C45.2 IN14.4 OUT14.2 Q15.2 U15.3 U15.7
GND15: C46.- C47.- C48.2 IN15.4 OUT15.2 Q16.2 U16.3 U16.7
GND16: C49.- C50.- C51.2 IN16.4 OUT16.2 Q17.2 U17.3 U17.7
GND17: C52.- C53.- C54.2 IN17.4 OUT17.2 Q18.2 U18.3 U18.7
GND18: C55.- C56.- C57.2 IN18.4 OUT18.2 Q19.2 U19.3 U19.7
GND19: C58.- C59.- C60.2 IN19.4 OUT19.2 Q20.2 U20.3 U20.7
GND20: C61.- C62.- C63.2 IN20.4 OUT20.2 Q21.2 U21.3 U21.7
N$1: Q1.3 R1.1 U1.1
N$2: Q2.3 R3.1 U2.1
N$3: Q3.3 R5.1 U3.1
N$4: Q4.3 R7.1 U4.1
N$5: Q5.3 R9.1 U5.1
N$6: Q6.3 R11.1 U6.1
N$7: Q7.3 R13.1 U7.1
N$8: Q8.3 R15.1 U8.1
N$9: Q9.3 R17.1 U9.1
N$10: Q10.3 R19.1 U10.1
N$11: Q11.3 R21.1 U11.1
N$12: Q12.3 R23.1 U12.1
N$13: Q13.3 R25.1 U13.1
N$14: Q14.3 R27.1 U14.1
N$15: Q15.3 R29.1 U15.1
N$16: Q16.3 R31.1 U16.1
N$17: Q17.3 R33.1 U17.1
N$18: Q18.3 R35.1 U18.1
N$19: Q19.3 R37.1 U19.1
N$20: Q20.3 R39.1 U20.1
N$21: Q21.3 R41.1 U21.1
ON/OFF: IN.3 Q1.1
ON/OFF1: IN1.3 Q2.1
ON/OFF2: IN2.3 Q3.1
ON/OFF3: IN3.3 Q4.1
ON/OFF4: IN4.3 Q5.1
ON/OFF5: IN5.3 Q6.1
ON/OFF6: IN6.3 Q7.1
ON/OFF7: IN7.3 Q8.1
ON/OFF8: IN8.3 Q9.1
ON/OFF9: IN9.3 Q10.1
ON/OFF10: IN10.3 Q11.1
ON/OFF11: IN11.3 Q12.1
ON/OFF12: IN12.3 Q13.1
ON/OFF13: IN13.3 Q14.1
ON/OFF14: IN14.3 Q15.1
ON/OFF15: IN15.3 Q16.1
ON/OFF16: IN16.3 Q17.1
ON/OFF17: IN17.3 Q18.1
ON/OFF18: IN18.3 Q19.1
ON/OFF19: IN19.3 Q20.1
ON/OFF20: IN20.3 Q21.1
PGOOD: IN.1 R2.1 U1.10
PGOOD1: IN1.1 R4.1 U2.10
PGOOD2: IN2.1 R6.1 U3.10
PGOOD3: IN3.1 R8.1 U4.10
PGOOD4: IN4.1 R10.1 U5.10
PGOOD5: IN5.1 R12.1 U6.10
PGOOD6: IN6.1 R14.1 U7.10
PGOOD7: IN7.1 R16.1 U8.10
PGOOD8: IN8.1 R18.1 U9.10
PGOOD9: IN9.1 R20.1 U10.10
PGOOD10: IN10.1 R22.1 U11.10
PGOOD11: IN11.1 R24.1 U12.10
PGOOD12: IN12.1 R26.1 U13.10
PGOOD13: IN13.1 R28.1 U14.10
PGOOD14: IN14.1 R30.1 U15.10
PGOOD15: IN15.1 R32.1 U16.10
PGOOD16: IN16.1 R34.1 U17.10
PGOOD17: IN17.1 R36.1 U18.10
PGOOD18: IN18.1 R38.1 U19.10
PGOOD19: IN19.1 R40.1 U20.10
PGOOD20: IN20.1 R42.1 U21.10
SEQ: IN.2 U1.9
SEQ1: IN1.2 U2.9
SEQ2: IN2.2 U3.9
SEQ3: IN3.2 U4.9
SEQ4: IN4.2 U5.9
SEQ5: IN5.2 U6.9
SEQ6: IN6.2 U7.9
SEQ7: IN7.2 U8.9
SEQ8: IN8.2 U9.9
SEQ9: IN9.2 U10.9
SEQ10: IN10.2 U11.9
SEQ11: IN11.2 U12.9
SEQ12: IN12.2 U13.9
SEQ13: IN13.2 U14.9
SEQ14: IN14.2 U15.9
SEQ15: IN15.2 U16.9
SEQ16: IN16.2 U17.9
SEQ17: IN17.2 U18.9
SEQ18: IN18.2 U19.9
SEQ19: IN19.2 U20.9
SEQ20: IN20.2 U21.9
TRIM: OUT.1 U1.6
TRIM1: OUT1.1 U2.6
TRIM2: OUT2.1 U3.6
TRIM3: OUT3.1 U4.6
TRIM4: OUT4.1 U5.6
TRIM5: OUT5.1 U6.6
TRIM6: OUT6.1 U7.6
TRIM7: OUT7.1 U8.6
TRIM8: OUT8.1 U9.6
TRIM9: OUT9.1 U10.6
TRIM10: OUT10.1 U11.6
TRIM11: OUT11.1 U12.6
TRIM12: OUT12.1 U13.6
TRIM13: OUT13.1 U14.6
TRIM14: OUT14.1 U15.6
TRIM15: OUT15.1 U16.6
TRIM16: OUT16.1 U17.6
TRIM17: OUT17.1 U18.6
TRIM18: OUT18.1 U19.6
TRIM19: OUT19.1 U20.6
TRIM20: OUT20.1 U21.6
VIN: C2.+ IN.5 R1.2 U1.2
VIN1: C5.+ IN1.5 R3.2 U2.2
VIN2: C8.+ IN2.5 R5.2 U3.2
VIN3: C11.+ IN3.5 R7.2 U4.2
VIN4: C14.+ IN4.5 R9.2 U5.2
VIN5: C17.+ IN5.5 R11.2 U6.2
VIN6: C20.+ IN6.5 R13.2 U7.2
VIN7: C23.+ IN7.5 R15.2 U8.2
VIN8: C26.+ IN8.5 R17.2 U9.2
VIN9: C29.+ IN9.5 R19.2 U10.2
VIN10: C32.+ IN10.5 R21.2 U11.2
VIN11: C35.+ IN11.5 R23.2 U12.2
VIN12: C38.+ IN12.5 R25.2 U13.2
VIN13: C41.+ IN13.5 R27.2 U14.2
VIN14: C44.+ IN14.5 R29.2 U15.2
VIN15: C47.+ IN15.5 R31.2 U16.2
VIN16: C50.+ IN16.5 R33.2 U17.2
VIN17: C53.+ IN17.5 R35.2 U18.2
VIN18: C56.+ IN18.5 R37.2 U19.2
VIN19: C59.+ IN19.5 R39.2 U20.2
VIN20: C62.+ IN20.5 R41.2 U21.2
VOUT: C1.+ C3.1 OUT.3 R2.2 U1.4 U1.5
VOUT1: C4.+ C6.1 OUT1.3 R4.2 U2.4 U2.5
VOUT2: C7.+ C9.1 OUT2.3 R6.2 U3.4 U3.5
VOUT3: C10.+ C12.1 OUT3.3 R8.2 U4.4 U4.5
VOUT4: C13.+ C15.1 OUT4.3 R10.2 U5.4 U5.5
VOUT5: C16.+ C18.1 OUT5.3 R12.2 U6.4 U6.5
VOUT6: C19.+ C21.1 OUT6.3 R14.2 U7.4 U7.5
VOUT7: C22.+ C24.1 OUT7.3 R16.2 U8.4 U8.5
VOUT8: C25.+ C27.1 OUT8.3 R18.2 U9.4 U9.5
VOUT9: C28.+ C30.1 OUT9.3 R20.2 U10.4 U10.5
VOUT10: C31.+ C33.1 OUT10.3 R22.2 U11.4 U11.5
VOUT11: C34.+ C36.1 OUT11.3 R24.2 U12.4 U12.5
VOUT12: C37.+ C39.1 OUT12.3 R26.2 U13.4 U13.5
VOUT13: C40.+ C42.1 OUT13.3 R28.2 U14.4 U14.5
VOUT14: C43.+ C45.1 OUT14.3 R30.2 U15.4 U15.5
VOUT15: C46.+ C48.1 OUT15.3 R32.2 U16.4 U16.5
VOUT16: C49.+ C51.1 OUT16.3 R34.2 U17.4 U17.5
VOUT17: C52.+ C54.1 OUT17.3 R36.2 U18.4 U18.5
VOUT18: C55.+ C57.1 OUT18.3 R38.2 U19.4 U19.5
VOUT19: C58.+ C60.1 OUT19.3 R40.2 U20.4 U20.5
VOUT20: C61.+ C63.1 OUT20.3 R42.2 U21.4 U21.5